# Altium PCB PCB.PcbDoc
Units mil, origin at the board's own origin, x right, y up, seen from the top; angles counter-clockwise.
Board outline 2050 x 1500 mil, 2 copper layers (Top Layer, Bottom Layer); 17 components, 38 nets, 121 pads, 35 vias.
Unrouted connection lines stored in the file: 12.
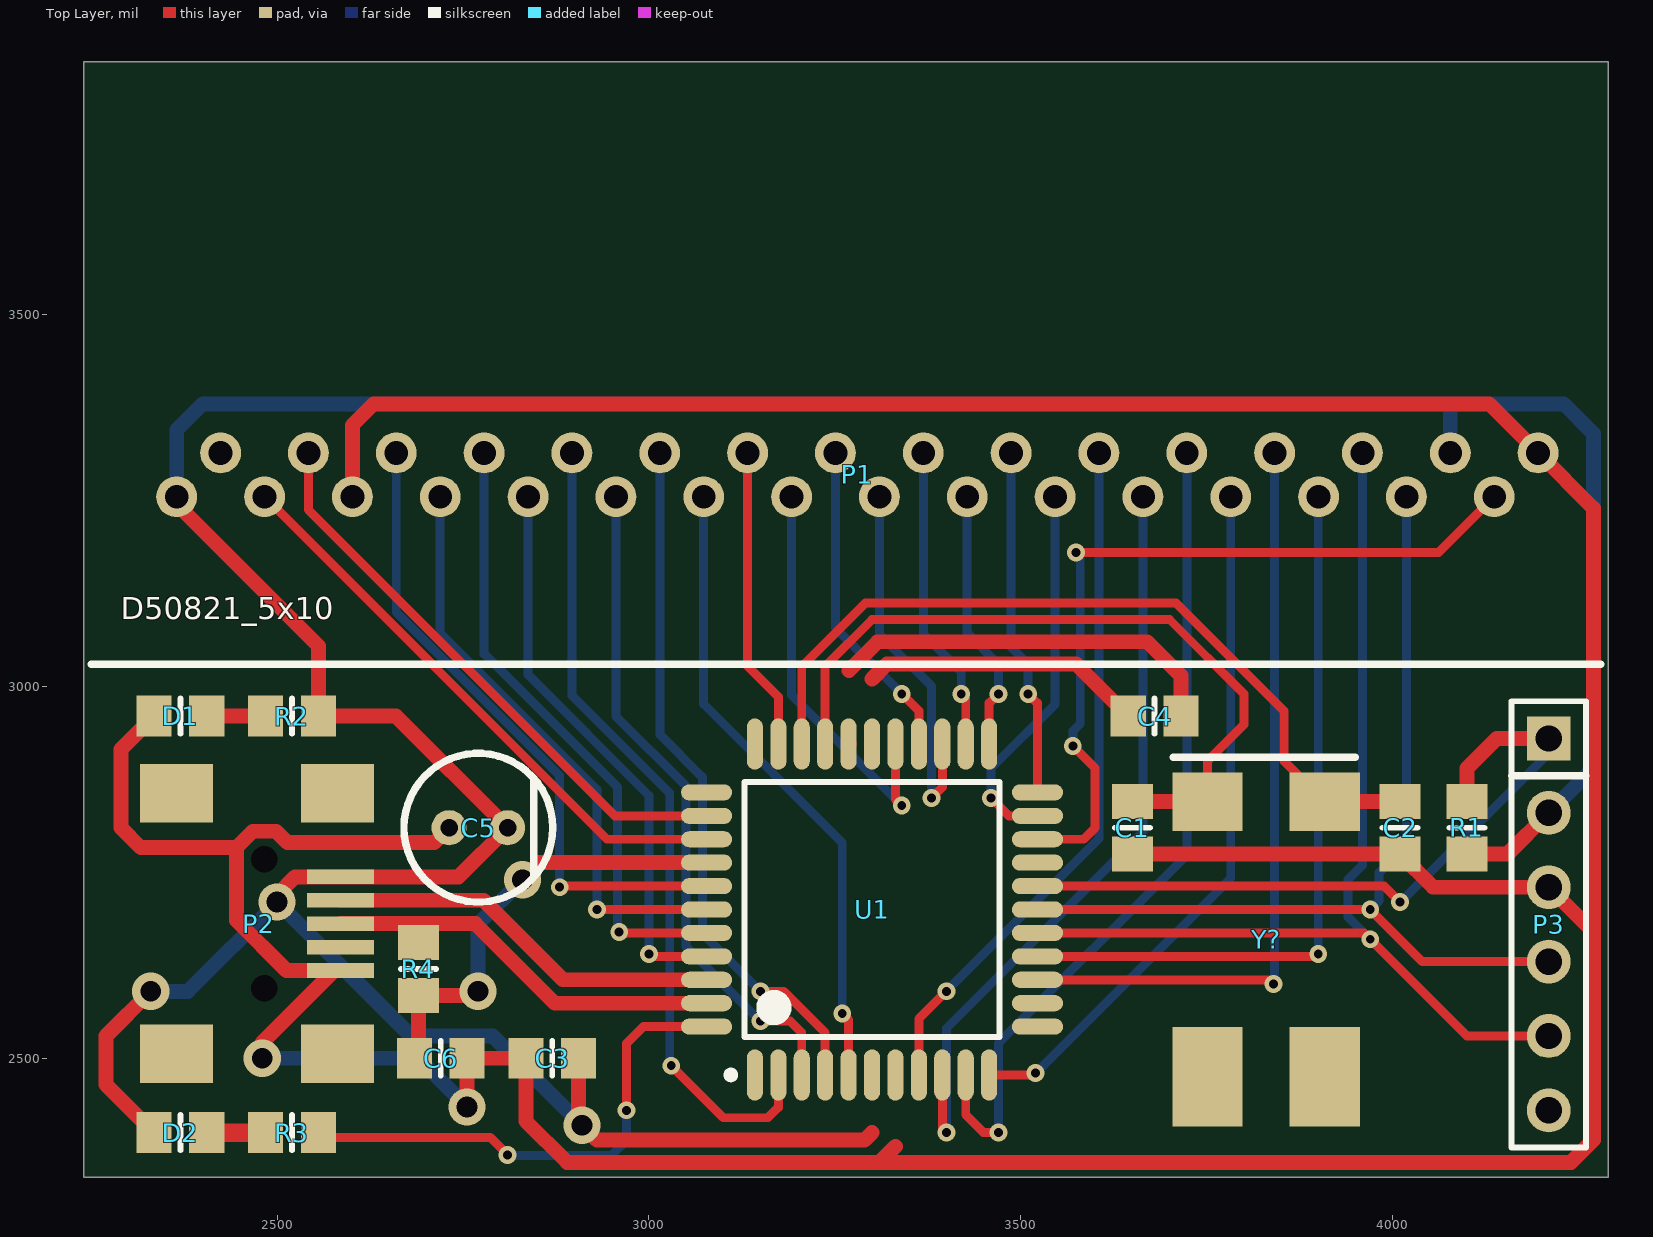
[diagram p0: Top Layer view]
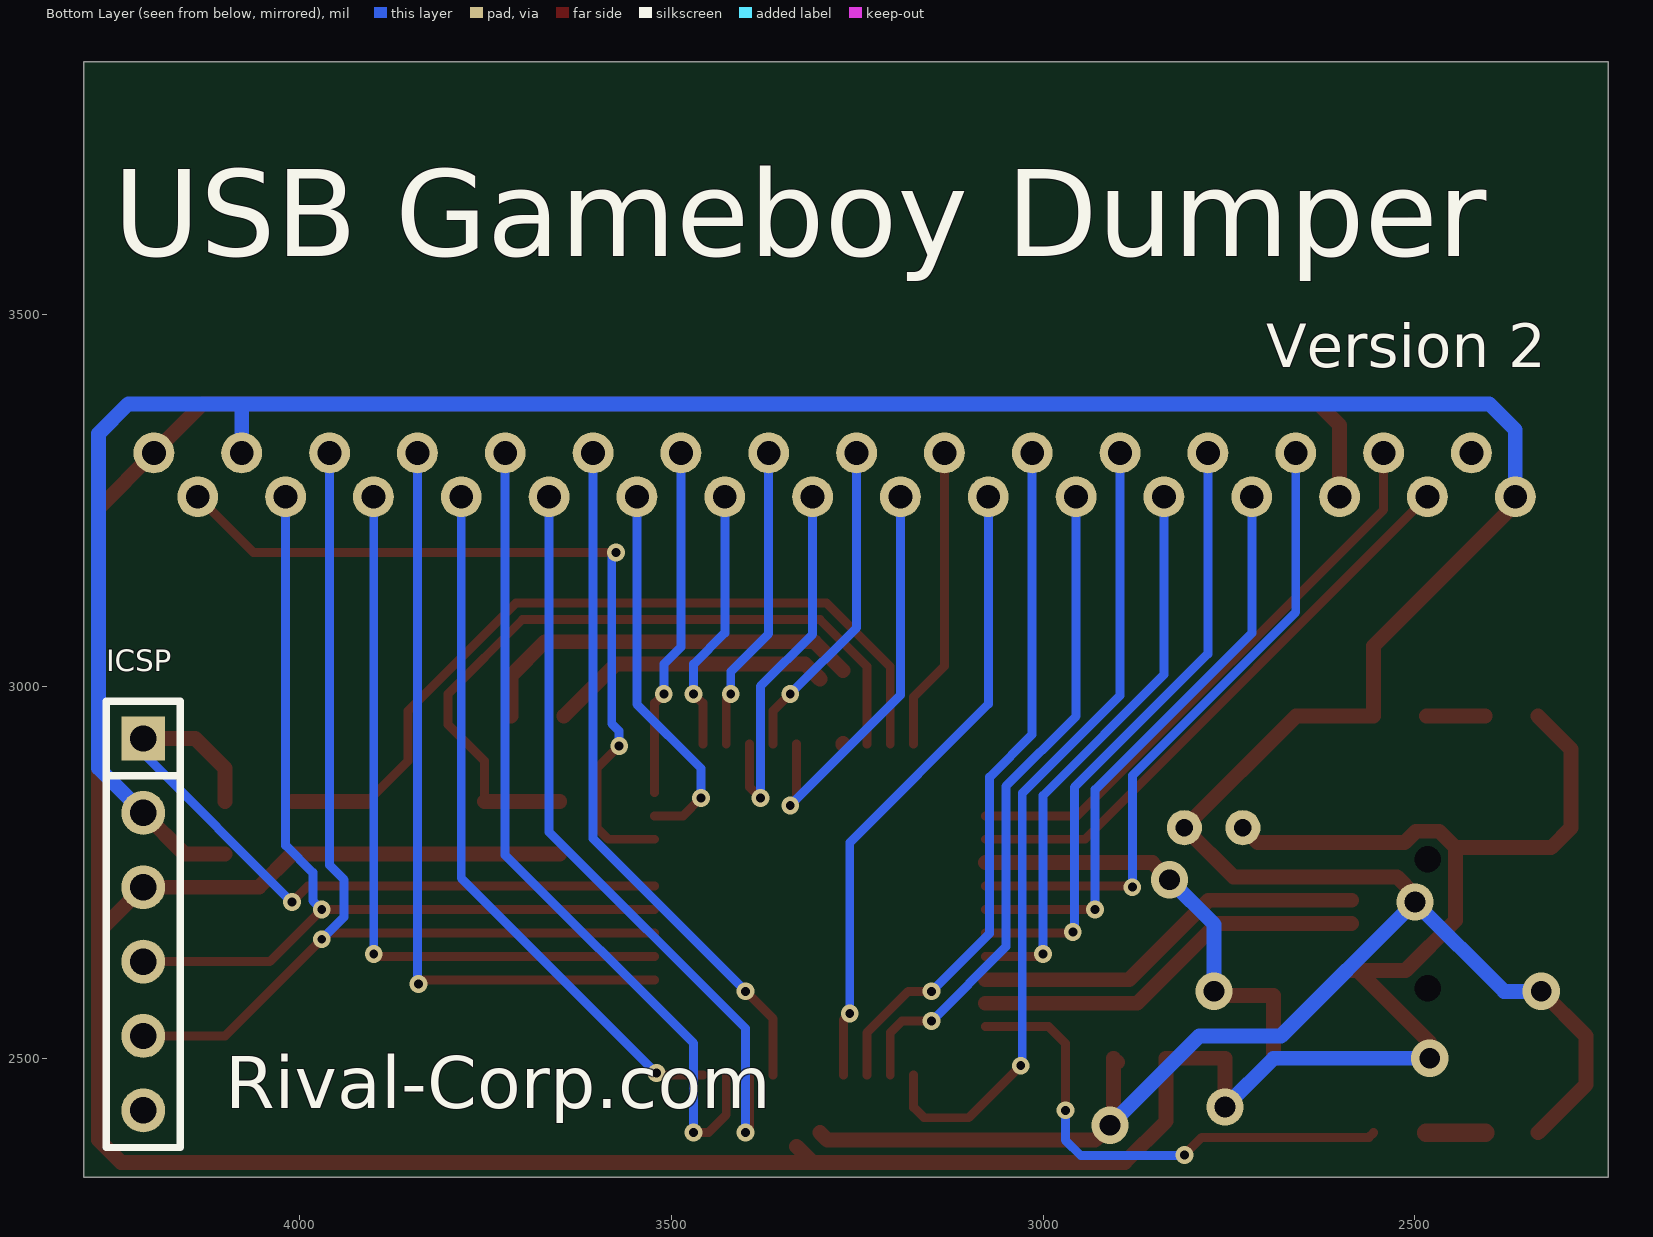
[diagram p1: Bottom Layer view, seen from below]
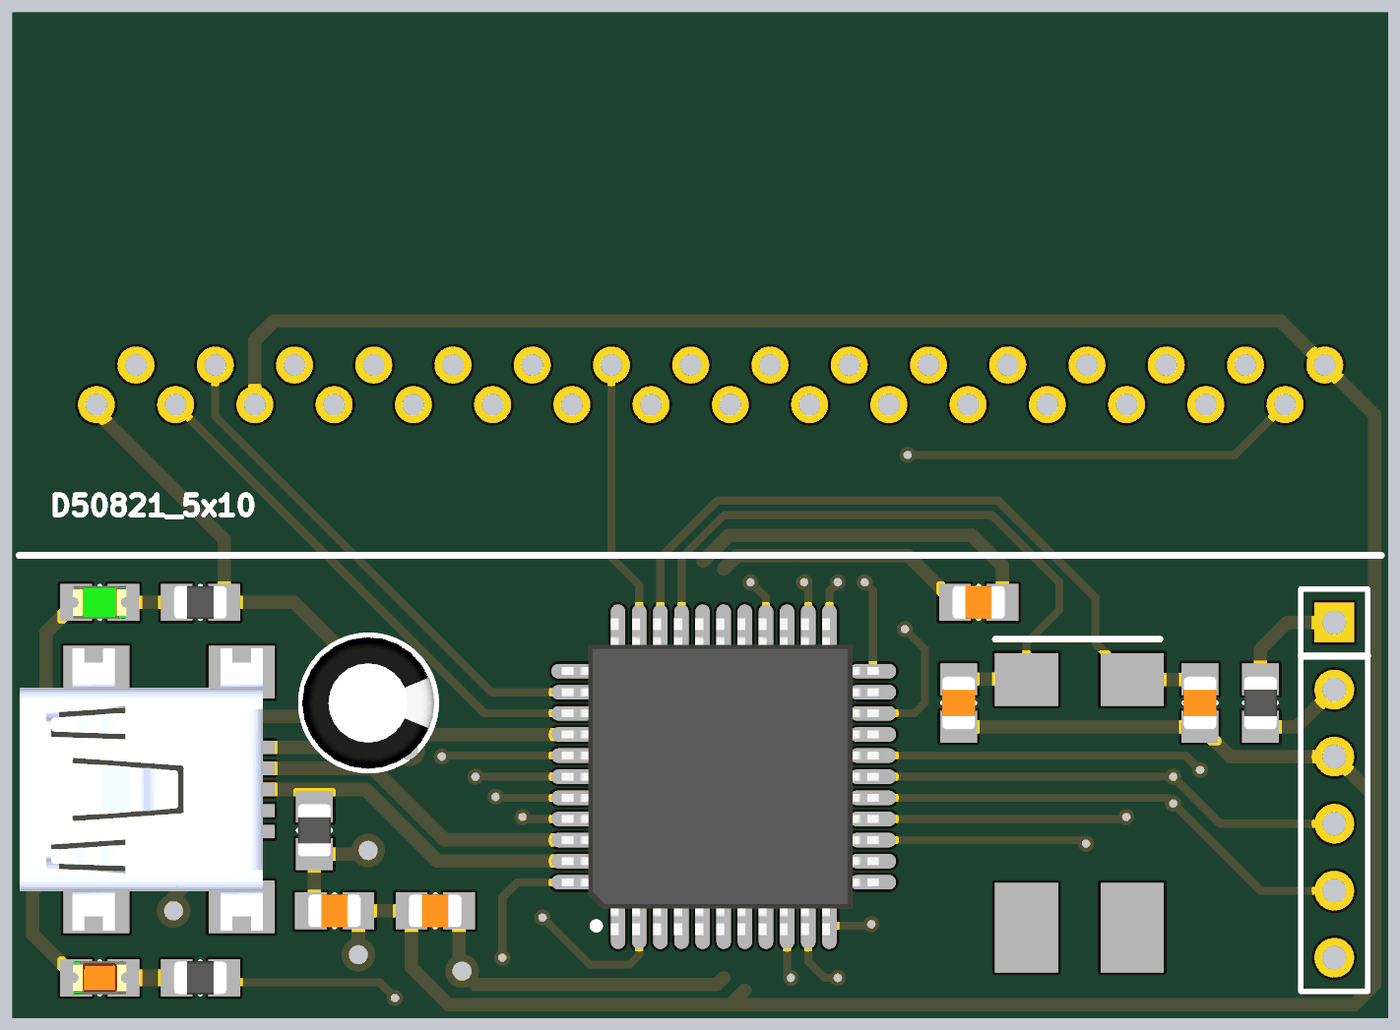
[diagram p2: 3D render of the assembled board from above, using the file's embedded part models]

## Layer stack, top to bottom
Top Layer: signal copper 1.4
Dielectric: dielectric 12.6, FR-4, Dk 4.8
Bottom Layer: signal copper 1.4

## Board outline
2240,3840 2240,2340 2350,2340 2780,2340 3200,2340 4010,2340 4230,2340 4290,2340 4290,3840

## Design rules (kind name [scope] priority, off if disabled: settings)
Clearance [All] p1: gap=10
DiffPairsRouting [All] p1: maxlimit=10 minlimit=10 mostfreqgap=10 maxuncoupledlength=500
PolygonConnect [All] p1: connectstyle=Relief reliefconductorwidth=10 reliefentries=4 polygonreliefangle="90 Angle"
RoutingVias [All] p1: holewidth=12 width=24 viastyle="Through Hole" minholewidth=12 minwidth=24 maxholewidth=12 maxwidth=24
SilkscreenOverComponentPads [All] p1: minsilkscreentomaskgap=10
SolderMaskExpansion [All] p1: expansion=4
Width [All] p1: maxlimit=50 minlimit=10 preferedwidth=10
26 further rules are at their usual default settings.

## Classes and differential pairs
differential pair OSC: +OSC_P -OSC_N
differential pair D: +D_P -D_N

## Components (designator, comment, footprint, x,y, rotation, side; value= is the part's Value field where it differs from the comment)
C1 "Cap" 6-0805_N 3650,2810 r90 top
C2 "Cap" 6-0805_N 4010,2810 r90 top
C3 "Cap" 6-0805_N 2870,2500 r0 top
C4 "Cap" 6-0805_N 3680,2960 r0 top
C5 "Cap Pol1" Capacitor 2810,2810 r180 top
C6 "Cap" 6-0805_N 2720,2500 r0 top
D1 "LED0" "6-0805_N -GREEN" 2370,2960 r180 top
D2 "LED0" "6-0805_N -RED" 2370,2400 r0 top
P1 "GBCONN" GBCONN 3265,3205 r0 top locked
P2 "USB Mini-B 5-Pin" USB 2480,2680 r270 top
P3 "Header 6" HDR1X6 4210,2930 r270 top
R1 "10K" "6-0805_N -RES" 4100,2810 r270 top
R2 "Res2" "6-0805_N -RES" 2520,2960 r0 top
R3 "Res2" "6-0805_N -RES" 2520,2400 r180 top
R4 "1.5K" "6-0805_N -RES" 2690,2620 r270 top
U1 "PIC18F4450-I/PT" TQFP-PT44_N 3300,2700 r90 top
Y? "XTAL" crystal 3830,2660 r270 top

## Footprints (in the part's own frame and the unit in brackets; to place one, negate y for a bottom-side part, rotate by r counter-clockwise, add the part's x,y. Pads: shape width x height; smd on the part's side, far side on the other; paste and mask are expansions set on the pad)
6-0805_N [mm] "Chip Resistor, Body 2.0x1.2mm, IPC Medium Density"
  rect 1.2x1.4 smd: 1(-0.9,0) 2(0.9,0)
  silkscreen extent 0,-0.6 0,0.6, body extent -1,-0.62 1,0.63
"6-0805_N -GREEN" [mm] "Chip Resistor, Body 2.0x1.2mm, IPC Medium Density"
  rect 1.2x1.4 smd: 1(-0.9,0) 2(0.9,0)
  silkscreen extent 0,-0.6 0,0.6, body extent -1.01,-0.62 1.01,0.63, height 1.1
"6-0805_N -RED" [mm] "Chip Resistor, Body 2.0x1.2mm, IPC Medium Density"
  rect 1.2x1.4 smd: 1(-0.9,0) 2(0.9,0)
  silkscreen extent 0,-0.6 0,0.6, body extent -1.01,-0.62 1.01,0.63, height 1.1
"6-0805_N -RES" [mm] "Chip Resistor, Body 2.0x1.2mm, IPC Medium Density"
  rect 1.2x1.4 smd: 1(-0.9,0) 2(0.9,0)
  silkscreen extent 0,-0.6 0,0.6, body extent -1,-0.62 1,0.63, height 0.76
Capacitor [mm]
  round 1.2 hole 0.6: 1(0,0) 2(2,0)
  silkscreen extent -1.54,-2.54 3.54,2.54, body extent -1.47,-2.5 3.52,2.5, height 7.01
crystal [mm]
  rect 2x2.4 smd: 1(-4.7,2) 2(-4.7,-2)
  rect 3.4x2.4 smd: 3(4.7,2) 4(4.7,-2)
  silkscreen extent -6.22,-3.18 -6.22,3.05
GBCONN [mil]
  round 55 hole 32: 1(-900,50) 2(-840.94,109.06) 3(-781.89,50) 4(-722.83,109.06) 5(-663.78,50) 6(-604.72,109.06) 7(-545.67,50) 8(-486.61,109.06) 9(-427.56,50) 10(-368.5,109.06) 11(-309.45,50) 12(-250.39,109.06) 13(-191.34,50) 14(-132.28,109.06) 15(-73.23,50) 16(-14.17,109.06) 17(44.88,50) 18(103.94,109.06) 19(162.99,50) 20(222.05,109.06) 21(281.1,50) 22(340.16,109.06) 23(399.21,50) 24(458.27,109.06) 25(517.32,50) 26(576.38,109.06) 27(635.43,50) 28(694.49,109.06) 29(753.54,50) 30(812.6,109.06) 31(871.65,50) 32(930.71,109.06)
  body extent -1024,-180 1024,633, height 386
HDR1X6 [mm] "Connector; Header; 6 Position"
  rect 1.5x1.5 hole 0.9: 1(0,0)
  round 1.5 hole 0.9: 2(2.54,0) 3(5.08,0) 4(7.62,0) 5(10.16,0) 6(12.7,0)
  silkscreen extent -1.27,-1.27 13.97,1.27
TQFP-PT44_N [mm] "Thin QFP, 44-Leads, Body 10x10mm, Pitch 0.8mm, IPC Medium Density"
  oval 1.75x0.55 smd: 1(-5.65,4) 2(-5.65,3.2) 3(-5.65,2.4) 4(-5.65,1.6) 5(-5.65,0.8) 6(-5.65,0) 7(-5.65,-0.8) 8(-5.65,-1.6) 9(-5.65,-2.4) 10(-5.65,-3.2) 11(-5.65,-4) 23(5.65,-4) 24(5.65,-3.2) 25(5.65,-2.4) 26(5.65,-1.6) 27(5.65,-0.8) 28(5.65,0) 29(5.65,0.8) 30(5.65,1.6) 31(5.65,2.4) 32(5.65,3.2) 33(5.65,4)
  oval 0.55x1.75 smd: 12(-4,-5.65) 13(-3.2,-5.65) 14(-2.4,-5.65) 15(-1.6,-5.65) 16(-0.8,-5.65) 17(0,-5.65) 18(0.8,-5.65) 19(1.6,-5.65) 20(2.4,-5.65) 21(3.2,-5.65) 22(4,-5.65) 34(4,5.65) 35(3.2,5.65) 36(2.4,5.65) 37(1.6,5.65) 38(0.8,5.65) 39(0,5.65) 40(-0.8,5.65) 41(-1.6,5.65) 42(-2.4,5.65) 43(-3.2,5.65) 44(-4,5.65)
  silkscreen extent -5.77,-4.35 4.35,4.95, body extent -6,-5.87 6,6.13, height 1.06
USB [mm]
  rect 0.5x2.3 smd: 1(-1.625,2.675) 2(-0.825,2.675) 3(-0.025,2.675) 4(0.775,2.675) 5(1.575,2.675)
  rect 2x2.5 smd: ""(-4.475,2.575) ""(-4.475,-2.925) ""(4.425,2.575) ""(4.425,-2.925)
  round 0 hole 0.9: ""(-2.225,0.075) ""(2.175,0.075)
  body extent -5.37,-5.82 5.33,3.38, height 3.95

## Part data
C1 C2 C3 C4 C6: "Capacitor"
C5: "Polarized Capacitor (Radial)"
D1 D2: "Typical INFRARED GaAs LED"
P2: "USB On-The-Go (OTG) Mini-B Receptacle, Right Angle, SMT, 0.80mm (.031\") Pitch, Solder Tabs with Back Cover, Recessed Type"
P3: "Header, 6-Pin"
R1 R4: library part Res2, "Resistor"
R2 R3: "Resistor"
U1: "High Performance, 12 MIPS, Enhanced Flash, USB Microcontroller with nanoWatt Technology, 16K Flash, 44-Pin TQFP, Industrial Temperature Range"
Y?: "Crystal Oscillator"

## Via types
v1: diameter 24, hole 12, Top Layer to Bottom Layer, tented both sides, 28 vias
v2: diameter 50, hole 28, Top Layer to Bottom Layer, tented both sides, 7 vias

## Nets (pads, with @x,y where several pads share a name; then routed paths per layer and width w, separated by ;. In a path a pad name is that pad's centre, name@x,y a point inside that pad or via, vN(x,y) a via of type N, cw(c..) or ccw(c..) an arc to the next point about the centre after c; other vN are vias at no path point)
!RD: P1.4 U1.35 | length 782.2
  Top Layer w12: P1.4 2542.17,3237.83 2954.02,2825.98 U1.35
!WR: P1.3 U1.36 | length 785.2
  Top Layer w12: P1.3 2943.62,2794.49 U1.36
A0: P1.6 U1.38 | length 873.2
  Top Layer w12: v1(2880,2730) 2881.5,2731.5 U1.38
  Bottom Layer w12: P1.6 2660.28,3099.72 2880,2880 v1(2880,2730)
A1: P1.7 U1.39 | length 789.8
  Top Layer w12: v1(2930,2700) U1.39
  Bottom Layer w12: P1.7 2719.33,3071.78 2930,2861.11 v1(2930,2700)
A2: P1.8 U1.40 | length 837.5
  Top Layer w12: v1(2960,2670) 2961.5,2668.5 U1.40
  Bottom Layer w12: P1.8 2778.39,3043.84 2958,2864.23 2958,2672 v1(2960,2670)
A3: P1.9 U1.41 | length 761.1
  Top Layer w12: v1(3000,2640) 3002.99,2637.01 U1.41
  Bottom Layer w12: P1.9 2837.44,3015.9 3000,2853.34 v1(3000,2640)
A4: P1.10 U1.2 | length 1101.7
  Top Layer w12: v1(3030,2490) 3100,2420 3160,2420 3174.02,2434.02 U1.2
  Bottom Layer w12: P1.10 2896.5,2987.95 3028,2856.45 3028,2492 v1(3030,2490)
A5: P1.11 U1.3 | length 904.4
  Top Layer w12: v1(3150,2550) 3190,2550 3205.51,2534.49 U1.3
  Bottom Layer w12: P1.11 2955.55,2960.01 3050,2865.56 3050,2650 v1(3150,2550)
A6: P1.12 U1.4 | length 946.8
  Top Layer w12: v1(3150,2590) 3181.11,2590 3237.01,2534.1 U1.4
  Bottom Layer w12: P1.12 3014.61,2935.39 3072,2878 3072,2668 v1(3150,2590)
A7: P1.13 U1.5 | length 858.1
  Top Layer w12: v1(3260,2560) 3268.5,2551.5 U1.5
  Bottom Layer w12: P1.13 3073.66,2976.34 3260,2790 v1(3260,2560)
A8: P1.14 U1.32 | length 408.7
  Top Layer w12: P1.14 3132.72,3027.28 3174.02,2985.98 U1.32
A9: P1.15 U1.27 | length 562.4
  Top Layer w12: U1.27 3331.5,2848.5 v1(3340,2840)
  Bottom Layer w12: P1.15 3191.77,2988.23 v1(3340,2840)
A10: P1.16 U1.26 | length 438.1
  Top Layer w12: v1(3340,2990) 3362.99,2967.01 U1.26
  Bottom Layer w12: P1.16 3250.83,3079.17 v1(3340,2990)
A11: P1.17 U1.25 | length 512.5
  Top Layer w12: v1(3380,2850) 3394.49,2864.49 U1.25
  Bottom Layer w12: P1.17 3309.88,3070.12 3380,3000 v1(3380,2850)
A12: P1.18 U1.24 | length 415.2
  Top Layer w12: v1(3420,2990) 3425.98,2984.02 U1.24
  Bottom Layer w12: P1.18 3368.94,3071.06 3420,3020 v1(3420,2990)
A13: P1.19 U1.23 | length 355.1
  Top Layer w12: U1.23 3457.48,2977.48 v1(3470,2990)
  Bottom Layer w12: P1.19 3427.99,3072.01 3470,3030 v1(3470,2990)
A14: P1.20 U1.22 | length 471.2
  Top Layer w12: v1(3510,2990) 3522.44,2977.56 U1.22
  Bottom Layer w12: P1.20 3487.05,3052.95 3510,3030 v1(3510,2990)
A15: P1.21 U1.21 | length 513.1
  Top Layer w12: v1(3460,2850) 3484.02,2825.98 U1.21
  Bottom Layer w12: v1(3460,2850) 3460,2890 3546.1,2976.1 P1.21
D0: P1.22 U1.8 | length 936.8
  Top Layer w12: U1.8 3362.99,2552.99 v1(3400,2590)
  Bottom Layer w12: v1(3400,2590) 3605.16,2795.16 P1.22
D1: P1.23 U1.9 | length 1044.3
  Top Layer w12: U1.9 3394.49,2405.51 v1(3400,2400)
  Bottom Layer w12: v1(3400,2400) 3400,2540 3664.21,2804.21 P1.23
D2: P1.24 U1.10 | length 1126.5
  Top Layer w12: U1.10 3425.98,2424.02 3450,2400 v1(3470,2400)
  Bottom Layer w12: v1(3470,2400) 3470,2520 3723.27,2773.27 P1.24
D3: P1.25 U1.11 | length 947.2
  Top Layer w12: U1.11 3517.56,2477.56 v1(3520,2480)
  Bottom Layer w12: v1(3520,2480) 3782.32,2742.32 P1.25
D4: P1.26 U1.14 | length 1034.5
  Top Layer w12: U1.14 3834.49,2605.51 v1(3840,2600)
  Bottom Layer w12: v1(3840,2600) 3841.38,2601.38 P1.26
D5: P1.27 U1.15 | length 994
  Top Layer w12: U1.15 3897.01,2637.01 v1(3900,2640)
  Bottom Layer w12: v1(3900,2640) 3900,3254.57 P1.27
D6_PGC: P1.28 P3.5 U1.16 | length 1419.5
  Top Layer w12: U1.16 3961.5,2668.5 v1(3970,2660) 4100,2530 P3.5
  Bottom Layer w12: P1.28 3959.49,2759.49 3940,2740 3940,2690 v1(3970,2660)
D7_PGD: P1.29 P3.4 U1.17 | length 1291.7
  Top Layer w12: U1.17 v1(3970,2700) 4040,2630 P3.4
  Bottom Layer w12: v1(3970,2700) 3982,2712 3982,2749.66 4018.54,2786.2 P1.29
D_N: P2.2 U1.42 | length 536.6
  Top Layer w20: P2.2 2777.52,2712.48 2884.49,2605.51 U1.42
D_P: P2.3 R4.1 U1.43 | length 536.6
  Top Layer w20: P2.3 2766.59,2680.98 2873.56,2574.02 U1.43
GND: C1.1 C2.1 C3.2 C4.2 C5.2 D1.2 P1.5 P1.32 P2.5 P3.3 U1.6 U1.29 | length 6831.3
  Top Layer w20: D1.2 2290,2915.43 2290,2810 2316.78,2783.22 2445.24,2783.22 ; v2(2480,2500) 2480,2521.28 P2.5@2576.72,2617.99 ; P2.5 P2.5@2576.72,2617.99 ; P1.5 2601.22,3351.22 2630,3380 4129.76,3380 P1.32 4270,3239.76 4270,2670 ; C5.2 2711.26,2790 2513.89,2790 2498.58,2805.32 2467.33,2805.32 2445.24,2783.22 ; v2(2755.43,2434.57) 2755.43,2500 2834.57,2500 2834.57,2415.43 2890,2360 3310,2360 ; 3300,3010 3320,3030 3574.57,3030 3644.57,2960 ; 3331.5,2381.5 3310,2360 ; C1.1 C2.1 4054.57,2730 P3.3 4270,2670 ; 2445.24,2783.22 2445.24,2685.43 2512.67,2617.99 P2.5@2576.72,2617.99 ; 3310,2360 4240,2360 4270,2390 4270,2670
  Bottom Layer w20: v2(2480,2500) 2690,2500 v2(2755.43,2434.57)
LED: R3.1 U1.44 | length 683
  Top Layer w12: R3.1 2561.87,2393.57 2786.43,2393.57 v1(2810,2370) ; v1(2970,2430) 2970,2520 2992.52,2542.52 U1.44
  Bottom Layer w12: v1(2810,2370) 2811,2369 2949,2369 2970,2390 v1(2970,2430)
MCLR: P3.1 R1.1 U1.18 | length 970.4
  Top Layer w12: U1.18 3988.5,2731.5 v1(4010,2710)
  Top Layer w20: R1.1 4100,2890 4140,2930 P3.1
  Bottom Layer w12: v1(4010,2710) 4210,2910 P3.1
NetD1_1: D1.1 R2.1 | length 79.1
  Top Layer w20: D1.1 R2.1
NetD2_2: D2.2 R3.2 | length 79.1
  Top Layer w25: D2.2 R3.2
OSC_N: C1.2 U1.30 Y?.2 | length 1001.1
  Top Layer w12: U1.30 3237.01,3027.01 3300,3090 3700,3090 3800,2990 3800,2948.74 3751.26,2900 Y?.2
  Top Layer w20: C1.2 Y?.2@3750.87,2845.43
OSC_P: C2.2 U1.31 Y?.1 | length 1093.7
  Top Layer w12: U1.31 3205.51,3026.62 3290.89,3112 3709.11,3112 3853.78,2967.33 3853.78,2900 Y?.1
  Top Layer w20: Y?.1 C2.2@4009.61,2845.04
SND: P1.31 U1.20 | length 1066.6
  Top Layer w12: U1.20 3584.49,2794.49 3600,2810 3600,2890 v1(3570,2920) ; v1(3574.1,3180) 4061.65,3180 P1.31
  Bottom Layer w12: v1(3570,2920) 3570,2940 3580,2950 3580,3174.1 v1(3574.1,3180)
VCC: C3.1 C4.1 C5.1 C6.2 D2.1 P1.1 P1.30 P2.1 P3.2 R1.2 R2.2 U1.7 U1.28 | length 5835.1
  Top Layer w20: v2(2330,2590) 2270,2530 2270,2464.57 D2.1 ; P1.1 2365,3245 2555.43,3054.57 R2.2 2660,2960 C5.1 2743.98,2743.98 P2.1 2523.98,2743.98 2500,2720 v2(2500,2710) ; 2900,2494.57 2905.43,2500 2905.43,2414.57 v2(2910,2410) 2930,2390 3290,2390 3300,2400 ; 3269.17,2921.77 3268.5,2922.44 3269.17,2923.11 ; 3269.17,3021.6 3307.57,3060 3670,3060 3715.43,3014.57 3715.43,2960 ; R1.2 4154.57,2774.57 P3.2
  Bottom Layer w20: v2(2330,2590) 2380,2590 v2(2500,2710) 2680,2530 2790,2530 v2(2910,2410) ; P1.1 2365,3345 2400,3380 4230,3380 4270,3340 4270,2890 P3.2 ; P1.30 4077.6,3372.4
VUSB: C6.1 R4.2 U1.37 | length 611
  Top Layer w20: C6.1 2690,2505.43 R4.2 2764.57,2584.57 v2(2770,2590) ; v2(2830,2740) 2852.99,2762.99 U1.37
  Bottom Layer w20: v2@2780,2590 v2(2770,2590) 2770,2680 v2(2830,2740)
pads on no net: P1.2 P2. P2.4 P3.6 U1.1 U1.12 U1.13 U1.19 U1.33 U1.34 Y?.3 Y?.4

## Silkscreen, mask and mechanical layers (free items; w line width, h text height)
Top Overlay:
  lines w10: 2250,3030 4280,3030 ; 4160,2880 4260,2880
  text "D50821_5x10" at 2290,3090 h30
Bottom Overlay:
  lines w10: 4160,2880 4260,2880 ; 4160,2380 4260,2380 4260,2980 4160,2980 4160,2380
  text "USB Gameboy Dumper" at 4250,3540 h200
  text "Version 2" at 2700,3410 h100
  text "ICSP" at 4260,3010 h50
  text "Rival-Corp.com" at 4100,2410 h120
Mechanical 13:
  lines w1: 2240,2340 2240,3840 4290,3840 4290,2340 2240,2340